# EAGLE board xLIDAR_rotor_3x_VL53L0X.rev.b (EAGLE 9.0.1)
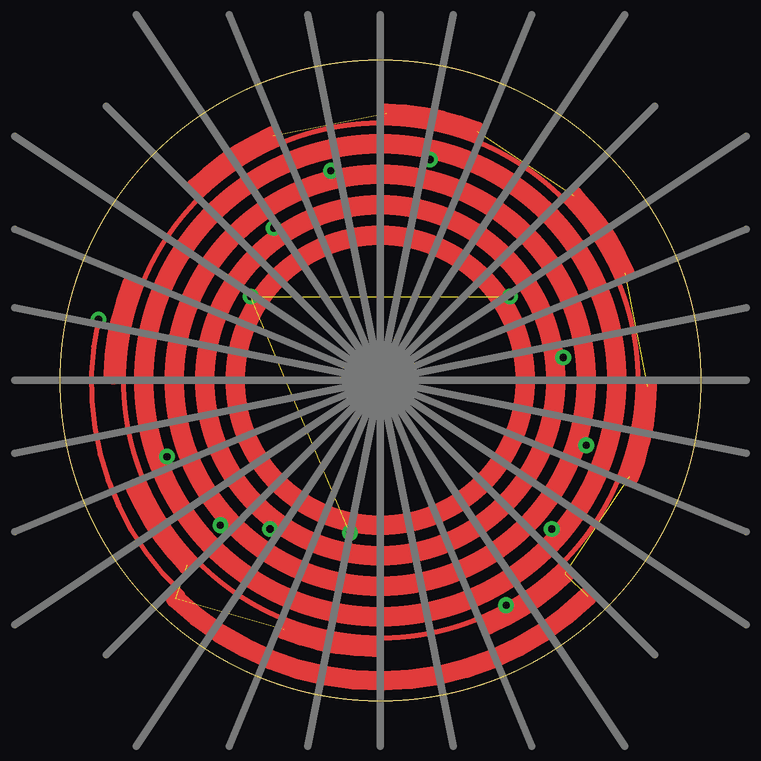
[diagram p0: board, top side]
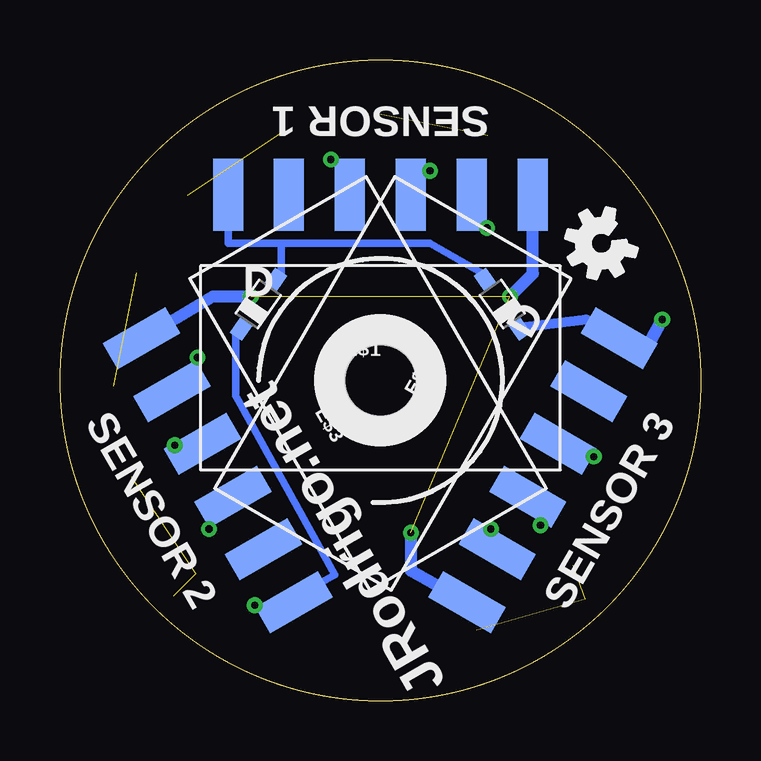
[diagram p1: board, bottom side, seen from below]

Size 26.7 x 26.7 mm. Coordinates in mm from the lower left corner, seen from the top.
Outline: circle at 13.35,13.35 radius 13.35
Copper layers (1*16): Top 0.0356mm / dielectric 1.5011mm / Bottom 0.0356mm
Design rules "oshpark-2layer *": minimum track width 6mil, minimum drill 13mil, track to track 6mil, track to pad 6mil, pad to pad 6mil, via to via 6mil, smd to smd 6mil, copper to edge 15mil, drill to drill 6mil, minimum pad ring 7mil, minimum via ring 7mil, stop-mask expansion 2.5mil, vias tented up to drill 50mil, thermal gap 10mil
Holes 3 mm at 13.35,13.35

## Footprints (pad centres in the part's own frame; a part is rotated, then mirrored left to right if it is on the bottom)
1X06-SMD-FEMALE = smd 1.25 x 3: 1 6.35,3.425; 2 3.81,3.425; 3 1.27,3.425; 4 -1.27,3.425; 5 -3.81,3.425; 6 -6.35,3.425
SOD323_ST = smd 0.8 x 0.6: A 1.25,0; C -1.25,0

## Placement (x,y rotation side)
E$1  [1X06-SMD-FEMALE]  13.35,17.67 0 bottom  (not fitted)
E$2  [1X06-SMD-FEMALE]  9.54,11.32 240 bottom  (not fitted)
E$3  [1X06-SMD-FEMALE]  17.16,11.32 120 bottom  (not fitted)
E$4  [SOD323_ST]  18.43,16.53 55 bottom
E$5  [SOD323_ST]  8.27,16.53 125 bottom
E$7  [OSHW-LOGO-S]  4.14,19.07 120 bottom

## Library data of the parts
E$1-E$3 = SparkFun-Connectors
E$4 E$5 = diode
E$7 = SparkFun-Aesthetics

## Tracks (layer width: path | path; a pad name or v marks a point on that pad's centre or on a via)
B  (7 unrouted)
  Top 0.813: 13.09,2.22 arc-20 9.34,2.97 | 5.31,5.65 arc-20 3.17,8.86 | 21.04,5.3 arc-20 17.84,3.17 | 5.66,21.39 arc-20 8.87,23.53 | 13.6,24.48 arc-20 17.37,23.73 | 21.4,21.04 arc-20 23.53,17.83 | 24.48,13.1 arc-20 23.73,9.33 | 21.99,4.35 arc-88 4.82,4.26
S$1  (via drill 0.3)
  other vias: 8.91,19.7
S$2  (via drill 0.3)
  other vias: 11.29,22.08
S$3  (via drill 0.3)
  other vias: 15.41,22.56
S$4  (via drill 0.3)
  other vias: 8.75,7.16
S$5  (via drill 0.3)
  other vias: 6.68,7.32
S$6  (via drill 0.3)
  other vias: 4.46,10.18
S$7  (via drill 0.3)
  other vias: 20.97,14.3
S$8  (via drill 0.3)
  other vias: 21.92,10.65
S$9  (via drill 0.3)
  other vias: 20.49,7.16
S$10
  Bottom 0.305: 9.06,17.8 11.29,19.07 17.48,19.07 | 19.7,20.97 19.7,19.07 17.48,19.07 | 17.48,19.07 17.48,17.8 17.8,17.48
S$11
  Top 0.813: 2.22,13.6 arc-20 2.99,17.35
S$13
  Bottom 0.406: 7.48,15.57 4.78,15.89 3.19,15.1
S$16
  Bottom 0.305: 19.38,15.41 19.38,12.72 15.26,5.25 17.16,4.14
S$17  (via drill 0.3)
  Top 0.203: v1.6,15.89 arc60 5.1,4.46
  Bottom 0.508: v1.6,15.89 2.4,14.46
S$18  (via drill 0.3)
  other vias: 18.59,3.98
VCC  (via drill 0.3)  (2 unrouted)
  Bottom 0.508: v7.95,16.84 7,17.8 7,21.61 | v18.75,16.84 20.34,16.84 23.51,14.94 | v12.08,7 12.08,5.41 9.22,3.83
(copper drawn outside any net)
  shapes: Top circle x5

## Text on the board
bNames: D | D
bSilk: SENSOR 1 | SENSOR 3 | SENSOR 2 | JRodrigo.net